# Altium PCB Interfac_JTAG.PcbDoc
Units mm, origin at the board's own origin, x right, y up, seen from the top; angles counter-clockwise.
Board outline 82.5 x 29 mm, 2 copper layers (Top Layer, Bottom Layer); 13 components, 25 nets, 117 pads, 0 vias.
Unrouted connection lines stored in the file: 46.
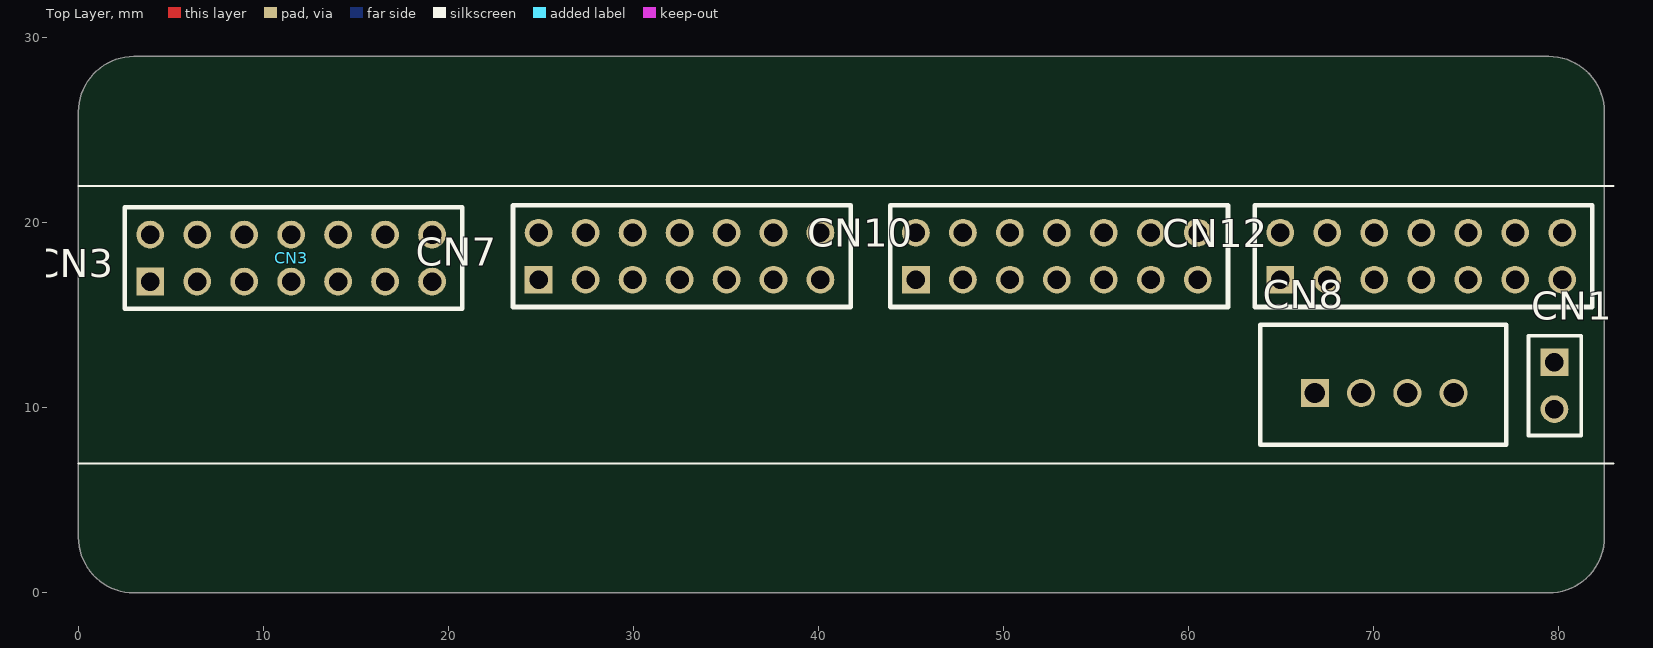
[diagram p0: Top Layer view]
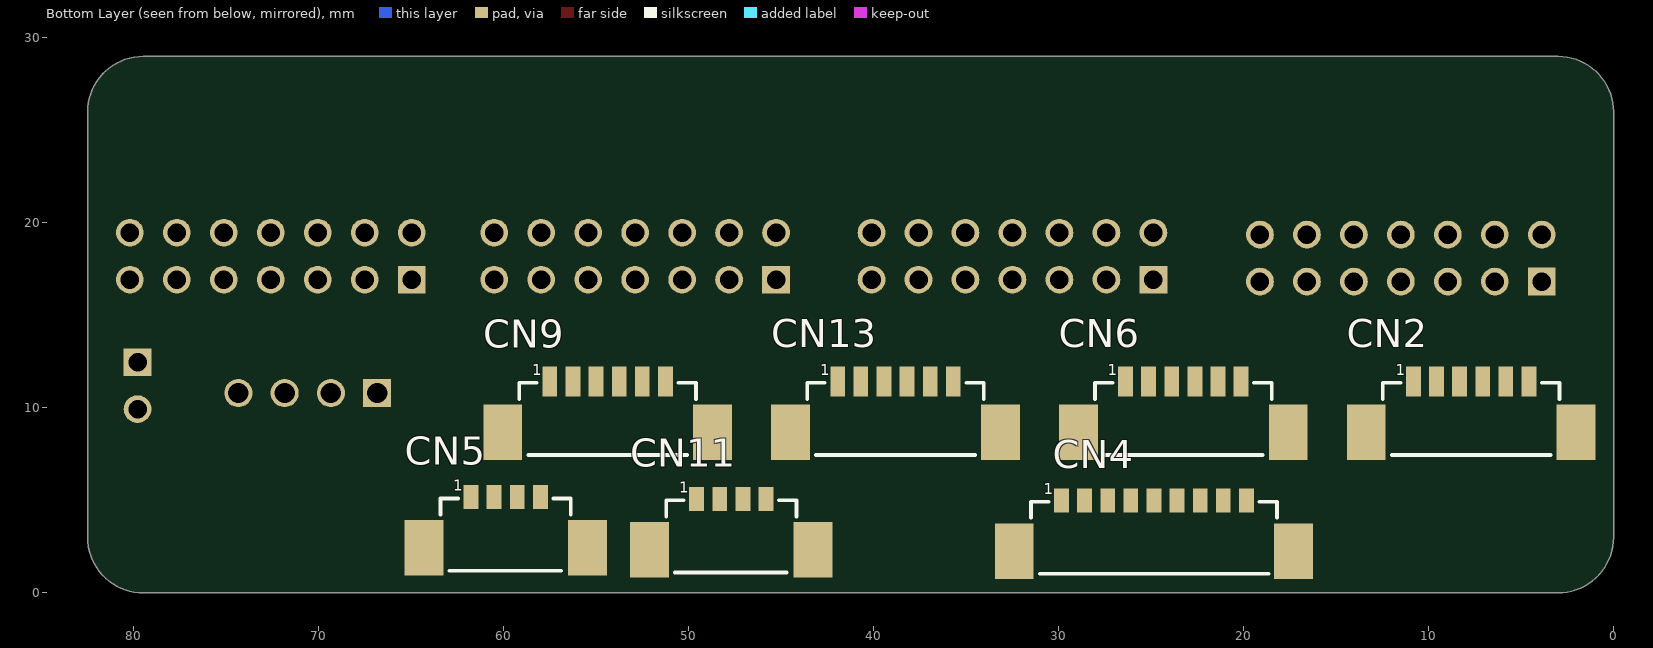
[diagram p1: Bottom Layer view, seen from below]

## Layer stack, top to bottom
Top Solder: solder mask 0.0102, Solder Resist, Dk 3.5
Top Layer: signal copper 0.0356
Dielectric 1: dielectric 0.32, FR-4, Dk 4.8
Bottom Layer: signal copper 0.0356
Bottom Solder: solder mask 0.0102, Solder Resist, Dk 3.5

## Board outline
79.5,0 ccw(c79.5,3) 82.5,3 82.5,26 ccw(c79.5,26) 79.5,29 3,29 ccw(c3,26) 0,26 0,3 ccw(c3,3) 3,0

## Design rules (kind name [scope] priority, off if disabled: settings)
Clearance [All] p1: gap=0.254 ignorepadtopadclearanceinfootprint=FALSE except(0: Arc-Hole Track-Hole SMDPad-Hole THPad-Hole Via-Hole Fill-Hole Poly-Hole Region-Hole Text-Hole)
PolygonConnect [All] p1: connectstyle=Relief reliefconductorwidth=0.254 reliefentries=4 polygonreliefangle="90 Angle" airgapwidth=0.254
RoutingVias [All] p1: holewidth=0.711 width=1.27 viastyle="Through Hole" minholewidth=0.711 minwidth=1.27 maxholewidth=0.711 maxwidth=1.27
SolderMaskExpansion [All] p1: expansion=0.102
Width [All] p1: maxlimit=0.254 minlimit=0.254 preferedwidth=0.254
30 further rules are at their usual default settings.

## Classes and differential pairs
component class 2_Interface_JTAG: CN1 CN2 CN3 CN4 CN6 CN7 CN8 CN9 CN10 CN11 CN12 CN13

## Components (designator, comment, footprint, x,y, rotation, side; value= is the part's Value field where it differs from the comment)
CN1 "M20-9990245" "CONN HEADER VERT 2POS 2.54mm" 79.8,11.2 r270 top
CN2 "53398-0671" "PICO BLADE 0533980671" 7.7,10.05 r180 bottom
CN3 "M20-9980745" "CONN HEADER VERT 14POS 2.54MM" 11.5,18.1 r0 top
CN4 "53398-0971" "PICO BLADE 0533980971" 24.85,3.625 r180 bottom
CN5 "0533980471" "PICO BLADE 0533980471" 59.9,3.8 r180 bottom
CN6 "53398-0671" "PICO BLADE 0533980671" 23.262,10.05 r180 bottom
CN7 "M20-9980745" "CONN HEADER VERT 14POS 2.54MM" 32.5,18.2 r0 top
CN8 "B4B-XH-A(LF)(SN)" B4B-XH-A(LF)(SN) 70.6,10.8 r0 top
CN9 "53398-0671" "PICO BLADE 0533980671" 54.387,10.05 r180 bottom
CN10 "M20-9980745" "CONN HEADER VERT 14POS 2.54MM" 52.9,18.2 r0 top
CN11 "0533980471" "PICO BLADE 0533980471" 47.7,3.7 r180 bottom
CN12 "M20-9980745" "CONN HEADER VERT 14POS 2.54MM" 72.6,18.2 r0 top
CN13 "53398-0671" "PICO BLADE 0533980671" 38.825,10.05 r180 bottom

## Footprints (in the part's own frame and the unit in brackets; to place one, negate y for a bottom-side part, rotate by r counter-clockwise, add the part's x,y. Pads: shape width x height; smd on the part's side, far side on the other; paste and mask are expansions set on the pad)
B4B-XH-A(LF)(SN) [mm]
  rect 1.524x1.524 hole 1.1: 1(-3.75,0)
  round 1.524 hole 1.1: 2(-1.25,0) 3(1.25,0) 4(3.75,0)
  silkscreen extent -6.7,-2.8 6.6,3.7, body extent -6.2,-2.38 6.2,3.38, height 7.01
"CONN HEADER VERT 2POS 2.54mm" [mm]
  rect 1.5x1.5 hole 1: 1(-1.27,0)
  round 1.5 hole 1: 2(1.27,0)
  silkscreen extent -2.7,-1.4 2.7,1.45, body extent -2.54,-1.25 2.54,1.29, height 8.65
"CONN HEADER VERT 14POS 2.54MM" [mm]
  rect 1.5x1.5 hole 1: 1(-7.62,-1.27)
  round 1.5 hole 1: 2(-7.62,1.27) 3(-5.08,-1.27) 4(-5.08,1.27) 5(-2.54,-1.27) 6(-2.54,1.27) 7(0,-1.27) 8(0,1.27) 9(2.54,-1.27) 10(2.54,1.27) 11(5.08,-1.27) 12(5.08,1.27) 13(7.62,-1.27) 14(7.62,1.27)
  silkscreen extent -9,-2.75 9.25,2.75, body extent -8.78,-2.58 9,2.5, height 8.65
"PICO BLADE 0533980471" [mm]
  rect 2.1x3 smd: 0(-4.425,-1.375) 0(4.425,-1.375)
  rect 0.8x1.3 smd: 1(-1.875,1.375) 2(-0.625,1.375) 3(0.625,1.375) 4(1.875,1.375)
  silkscreen extent -3.52,-2.6 3.52,1.3, body extent -5.07,-2.5 5.08,1.7, height 4.7
"PICO BLADE 0533980671" [mm] "CONN HEADER SMD 6POS 1.25MM"
  rect 2.1x3 smd: 0(-5.675,-1.375) 0(5.675,-1.375)
  rect 0.8x1.6 smd: 1(-3.125,1.375) 2(-1.875,1.375) 3(-0.625,1.375) 4(0.625,1.375) 5(1.875,1.375) 6(3.125,1.375)
  silkscreen extent -4.77,-2.6 4.77,1.3, body extent -6.33,-2.5 6.32,1.7, height 4.7
"PICO BLADE 0533980971" [mm]
  rect 2.1x3 smd: 0(-7.55,-1.375) 0(7.55,-1.375)
  rect 0.8x1.3 smd: 1(-5,1.375) 2(-3.75,1.375) 3(-2.5,1.375) 4(-1.25,1.375) 5(0,1.375) 6(1.25,1.375) 7(2.5,1.375) 8(3.75,1.375) 9(5,1.375)
  silkscreen extent -6.65,-2.6 6.65,1.3, body extent -8.2,-2.5 8.2,1.7, height 4.7

## Part data
CN1: "M20 HDR, PIN, SIL, VERT, 2W", Case/Package=SIL, Color=Black, Contact Resistance=25mR, Current=3A, Insulation Resistance=10GR, Manufacturer=Harwin, Max Operating Temperature=105°C, Min Operating Temperature=-40°C, Package Quantity=1000, Supplier Part Number 1=952-2261-ND, Voltage=50V, Voltage Rating (AC)=750V, ComponentLink1Description=http://www.farnell.com/datasheets/2368211.pdf?src-supplier=Element14, ComponentLink1URL=http://www.farnell.com/datasheets/2368211.pdf?src-supplier=Element14, ComponentLink2Description=http://uk.rs-online.com/webdocs/1388/0900766b81388728.pdf?src-supplier=RSComponents, ComponentLink2URL=http://uk.rs-online.com/webdocs/1388/0900766b81388728.pdf?src-supplier=RSComponents, ComponentLink3Description=https://cdn.harwin.com/pdfs/Harwin_PC_Connectors_M20.pdf?src-supplier=Digi-Key, ComponentLink3URL=https://cdn.harwin.com/pdfs/Harwin_PC_Connectors_M20.pdf?src-supplier=Digi-Key, ComponentLink4Description=http://www.mouser.com/ds/2/181/Harwin_Product_Catalog_page_206-1134556.pdf?src-supplier=Mouser, ComponentLink4URL=http://www.mouser.com/ds/2/181/Harwin_Product_Catalog_page_206-1134556.pdf?src-supplier=Mouser, Connector Type="Male Pin", Contact Material=Brass,Bronze, Contact Mating Length=0.24inch, Contact Plating=Gold, Current Rating=3A, Depth=2.54mm, Gender=Male, Height=0.12inch, Housing Color=Black, Housing Material=Nylon, Lead Pitch=2.54mm, Length=5.08mm, Manufacturer Part Number=M20-9990245, Mating Cycles=300, Max Current Rating=3A, Mount="Through Hole", Number of Contacts=2, Number of Poles=2, Number of Positions=2, Number of Rows=1, Orientation=Straight, Packaging=Bag, Pitch=2.54mm, Pricing 1="1=0.15, 10=0.136, 100=0.0841, 500=0.0696, 1000=0.0609, 5000=0.0522, 10000=0.05075 (USD)", Pricing 2="1=0.14, 10=0.083, 100=0.069, 1000=0.06, 2000=0.052, 10000=0.05 (USD)", Radiation Hardening=No, REACH SVHC="No SVHC", Stock 1=27298, Stock 2=26881, Supplier 1=Digi-Key, Supplier 2=Mouser, Supplier Part Number 2=855-M20-9990245, Termination=Solder, Weight=0.25lb, Width=0.25inch, Working Voltage=750V
CN2 CN6 CN9 CN13: "1.25mm Pitch PicoBlade™ Header, Surface Mount, Vertical, 6 Circuits", Color=Natural, Contact Resistance=20mR, Current Rating=1A, Flammability Rating="UL94 V-0", Insulation Resistance=100MR, Manufacturer=Molex, Max Operating Temperature=85°C, Min Operating Temperature=-40°C, Package Quantity=1000, Supplier Part Number 1=WM7610DKR-ND, Voltage Rating=125V, Body Plating=Tin, ComponentLink1Description=https://www.molex.com/pdm_docs/sd/533980671_sd.pdf?src-supplier=Digi-Key, ComponentLink1URL=https://www.molex.com/pdm_docs/sd/533980671_sd.pdf?src-supplier=Digi-Key, Contact Material=Bronze,Tin, Contact Plating=Tin, Gender=Male, Glow Wire Compliant=Non-compliant, Housing Color=Natural, Housing Material=Nylon, Lead Free="Lead Free", Lead Pitch=1.25mm, Manufacturer Part Number=53398-0671, Mount="Surface Mount", Number of Circuits=6, Number of Contacts=6, Number of Positions=6, Number of Rows=1, Orientation=Vertical, Packaging="Tape and Reel", Pitch=1.25mm, Pricing 1="1=1.39, 10=1.26, 100=1.0802, 500=0.90014 (USD)", Pricing 2="1=1.15, 10=1.01, 100=0.864, 500=0.727, 1000=0.427, 2000=0.374 (USD)", Radiation Hardening=No, REACH SVHC=Unknown, Stock 1=21086, Stock 2=26, Supplier 1=Digi-Key, Supplier 2=Mouser, Supplier Part Number 2=538-53398-0671, Termination=Solder, Voltage Rating (AC)=125V, Voltage Rating (DC)=125V, Working Voltage=125V
CN3 CN7 CN10 CN12: "Headers & Wire Housings 07+07 DIL VERTICAL PIN HEADER GOLD HT", Color=Black, Contact Resistance=25mR, Manufacturer=Harwin, Max Current Rating=3A, Max Operating Temperature=105°C, Min Operating Temperature=-40°C, Package Quantity=500, Supplier Part Number 1=952-1932-ND, ComponentLink1Description=https://www.verical.com/server-webapp/html/getDatasheet?partID=468550&src-supplier=Verical, ComponentLink1URL=https://www.verical.com/server-webapp/html/getDatasheet?partID=468550&src-supplier=Verical, ComponentLink2Description=http://www.harwin.com/include/downloads/drawings/M20-998.PDF?src-supplier=Element14, ComponentLink2URL=http://www.harwin.com/include/downloads/drawings/M20-998.PDF?src-supplier=Element14, ComponentLink3Description=http://www.mouser.com/ds/2/181/M20-998-351176.pdf?src-supplier=Mouser, ComponentLink3URL=http://www.mouser.com/ds/2/181/M20-998-351176.pdf?src-supplier=Mouser, Connector Type="Male Pin", Contact Material=Brass, Contact Mating Length=0.24inch, Contact Plating=Gold, Depth=5.08mm, Gender=Male, Housing Color=Black, Housing Material=Nylon, Length=17.78mm, Manufacturer Part Number=M20-9980745, Mount="Through Hole", Number of Contacts=14, Number of Positions=14, Number of Rows=2, Orientation=Straight, Packaging=Bag, Pitch=2.54mm, Pricing 1="1=0.54, 10=0.51, 100=0.391, 500=0.34, 1000=0.2805, 5000=0.2465, 10000=0.2295 (USD)", Pricing 2="1=0.54, 10=0.51, 100=0.387, 500=0.34, 1000=0.28, 2500=0.246 (USD)", Radiation Hardening=No, REACH SVHC="No SVHC", Row Spacing=0.1inch, Stock 1=15564, Stock 2=1790, Supplier 1=Digi-Key, Supplier 2=Mouser, Supplier Part Number 2=855-M20-9980745, Termination=Solder
CN4: "Conn Shrouded Header HDR 9 POS 1.25mm Solder ST SMD PicoBlade™ Embossed T/R", Color=White, Contact Resistance=20mR, Current Rating=1A, Flammability Rating="UL94 V-0", Housing Color=Natural, Insulation Resistance=100MR, Manufacturer=Molex, Max Operating Temperature=85°C, Min Operating Temperature=-40°C, Package Quantity=1000, Supplier Part Number 1=WM7613CT-ND, Voltage Rating=125V, Body Plating=Tin, ComponentLink1Description=http://www.jameco.com/Jameco/Products/ProdDS/1973904.pdf?src-supplier=Jameco, ComponentLink1URL=http://www.jameco.com/Jameco/Products/ProdDS/1973904.pdf?src-supplier=Jameco, ComponentLink2Description=http://www.molex.com/webdocs/datasheets/pdf/en-us/0533980971_PCB_HEADERS.pdf?src-supplier=Avnet, ComponentLink2URL=http://www.molex.com/webdocs/datasheets/pdf/en-us/0533980971_PCB_HEADERS.pdf?src-supplier=Avnet, ComponentLink3Description=http://www.mouser.com/ds/2/276/0533980971_PCB_HEADERS-146631.pdf?src-supplier=Mouser, ComponentLink3URL=http://www.mouser.com/ds/2/276/0533980971_PCB_HEADERS-146631.pdf?src-supplier=Mouser, ComponentLink4Description=http://uk.rs-online.com/webdocs/13c4/0900766b813c4505.pdf?src-supplier=RSComponents, ComponentLink4URL=http://uk.rs-online.com/webdocs/13c4/0900766b813c4505.pdf?src-supplier=RSComponents, ComponentLink5Description=https://www.distrelec.biz/Web/Downloads/46/_e/gf116833-116846_e.pdf?mime=application%2Fpdf&src-supplier=Distrelec, ComponentLink5URL=https://www.distrelec.biz/Web/Downloads/46/_e/gf116833-116846_e.pdf?mime=application%2Fpdf&src-supplier=Distrelec, Contact Gender=Male, Contact Material=Bronze,Brass,Tin, Contact Plating=Tin, Gender=Male, Glow Wire Compliant=Non-compliant, Housing Material=Nylon, Lead Free="Lead Free", Lead Pitch=1.25mm, Manufacturer Part Number=53398-0971, Mount="Surface Mount", Number of Circuits=9, Number of Contacts=9, Number of Positions=9, Number of Rows=1, Orientation=Vertical, Packaging="Tape and Reel", Pitch=1.25mm, Pricing 1="1=1.73, 10=1.566, 100=1.3421, 500=1.11842 (USD)", Pricing 2="1=1.44, 10=1.26, 100=1.08, 500=0.911, 1000=0.531, 2000=0.464 (USD)", Radiation Hardening=No, REACH SVHC=Unknown, Stock 1=5383, Stock 2=2287, Supplier 1=Digi-Key, Supplier 2=Mouser, Supplier Part Number 2=538-53398-0971, Termination=SMD/SMT, Voltage Rating (AC)=125V, Voltage Rating (DC)=125V, Working Voltage=125V
CN5 CN11: "CONN HEADER SMD 4POS 1.25MM", Manufacturer=Molex, Mount Type=SMD, N of Positions=4, Pitch=1.25mm
CN8: "JST (JAPAN SOLDERLESS TERMINALS) - B4B-XH-A (LF)(SN) - Wire-To-Board-Steckverbinder, vertikal, 2.5 mm, 4 Kontakt(e), Stiftleiste, Baureihe XH", Color=Natural, Contact Resistance=20mR, Current Rating=3A, Housing Color=White, Insulation Resistance=1GR, Manufacturer=JST, Max Operating Temperature=85°C, Max Voltage Rating (AC)=250V, Min Operating Temperature=-25°C, Package Quantity=500, Supplier Part Number 1=455-2249-ND, ComponentLink1Description=https://www.verical.com/server-webapp/html/getDatasheet?partID=455616&src-supplier=Verical, ComponentLink1URL=https://www.verical.com/server-webapp/html/getDatasheet?partID=455616&src-supplier=Verical, ComponentLink2Description=https://www.verical.com/server-webapp/html/getDatasheet?partID=640571&src-supplier=Verical, ComponentLink2URL=https://www.verical.com/server-webapp/html/getDatasheet?partID=640571&src-supplier=Verical, ComponentLink3Description=http://www.jst-mfg.com/product/pdf/eng/eXH.pdf?src-supplier=Digi-Key, ComponentLink3URL=http://www.jst-mfg.com/product/pdf/eng/eXH.pdf?src-supplier=Digi-Key, ComponentLink4Description=http://www.jst-mfg.com/product/pdf/eng/eXH.pdf?src-supplier=Future+Electronics, ComponentLink4URL=http://www.jst-mfg.com/product/pdf/eng/eXH.pdf?src-supplier=Future+Electronics, Connector Type="Male Pin", Contact Material=Brass, Contact Plating=Tin,Copper,Lead, Depth=5.75mm, Gender=Male, Housing Material=Polyamide, Lead Free="Lead Free", Lead Pitch=2.5mm, Length=12.4mm, Manufacturer Part Number=B4B-XH-A(LF)(SN), Material=Polyamide, Max Current Rating=3A, Max Voltage Rating (DC)=250V, Mount="Through Hole", Number of Contacts=4, Number of Positions=4, Number of Rows=1, Orientation=Straight, Packaging=Bulk, Pitch=2.5mm, Pricing 1="1=0.21, 10=0.194, 100=0.1348, 500=0.11406, 1000=0.09333, 5000=0.08296, 10000=0.07518 (USD)", REACH SVHC="No SVHC", Stock 1=12513, Supplier 1=Digi-Key, Termination=Press-Fit, Voltage Rating=250V, Voltage Rating (AC)=250V, Wire/Cable Gauge=22AWG

## Nets (pads, with @x,y where several pads share a name; then routed paths per layer and width w, separated by ;. In a path a pad name is that pad's centre, name@x,y a point inside that pad or via, vN(x,y) a via of type N, cw(c..) or ccw(c..) an arc to the next point about the centre after c; other vN are vias at no path point)
"BAT +": CN8.1 CN8.2 CN11.1 CN11.2
"BAT -": CN8.3 CN8.4 CN11.3 CN11.4
GND: CN2.6 CN3.9 CN4.1 CN6.6 CN7.9 CN9.6 CN10.9 CN12.9 CN13.6
JTAG1_TCK: CN2.3 CN3.7
JTAG1_TDO_TDI: CN2.2 CN3.1
JTAG1_VCC: CN2.1 CN3.2
JTAG2_TCK: CN6.3 CN7.7
JTAG2_TDO_TDI: CN6.2 CN7.1
JTAG2_VCC: CN6.1 CN7.2
JTAG3_TCK: CN9.3 CN10.7
JTAG3_TDO_TDI: CN9.2 CN10.1
JTAG3_VCC: CN9.1 CN10.2
JTAG4_TCK: CN12.7 CN13.3
JTAG4_TDO_TDI: CN12.1 CN13.2
JTAG4_VCC: CN12.2 CN13.1
RBF+: CN1.1 CN5.1 CN5.2
RBF-: CN1.2 CN5.3 CN5.4
UART_Rx1: CN2.5 CN3.14 CN4.8
UART_Rx2: CN4.6 CN6.5 CN7.14
UART_Rx3: CN4.4 CN9.5 CN10.14
UART_Rx4: CN4.2 CN12.14 CN13.5
UART_Tx1: CN2.4 CN3.12 CN4.9
UART_Tx2: CN4.7 CN6.4 CN7.12
UART_Tx3: CN4.5 CN9.4 CN10.12
UART_Tx4: CN4.3 CN12.12 CN13.4
pads on no net: CN2.0 CN3.3 CN3.4 CN3.5 CN3.6 CN3.8 CN3.10 CN3.11 CN3.13 CN4.0 CN5.0 CN6.0 CN7.3 CN7.4 CN7.5 CN7.6 CN7.8 CN7.10 CN7.11 CN7.13 CN9.0 CN10.3 CN10.4 CN10.5 CN10.6 CN10.8 CN10.10 CN10.11 CN10.13 CN11.0 CN12.3 CN12.4 CN12.5 CN12.6 CN12.8 CN12.10 CN12.11 CN12.13 CN13.0

## Silkscreen, mask and mechanical layers (free items; w line width, h text height)
Top Overlay:
  lines w0.1: 0,7 83,7 ; 0,22 83,22

## Text inside footprints (layer, text, board x,y; h text height)
CN2: Bottom Overlay "1" at 11.775,11.55 h1
CN4: Bottom Overlay "1" at 30.8,5.125 h1
CN5: Bottom Overlay "1" at 62.725,5.3 h1
CN6: Bottom Overlay "1" at 27.337,11.55 h1
CN9: Bottom Overlay "1" at 58.462,11.55 h1
CN11: Bottom Overlay "1" at 50.525,5.2 h1
CN13: Bottom Overlay "1" at 42.9,11.55 h1